# Altium PCB PMS.PcbDoc (part 2 of 3)
Units mm, origin at the board's own origin, x right, y up, seen from the top; angles counter-clockwise.
Board outline 23.9 x 83.5 mm, 4 copper layers (Top Layer, Mid Layer 1, Mid Layer 2, Bottom Layer), stack 0.77 mm thick; 91 components, 62 nets, 411 pads, 218 vias.
Unrouted connection lines stored in the file: 98.
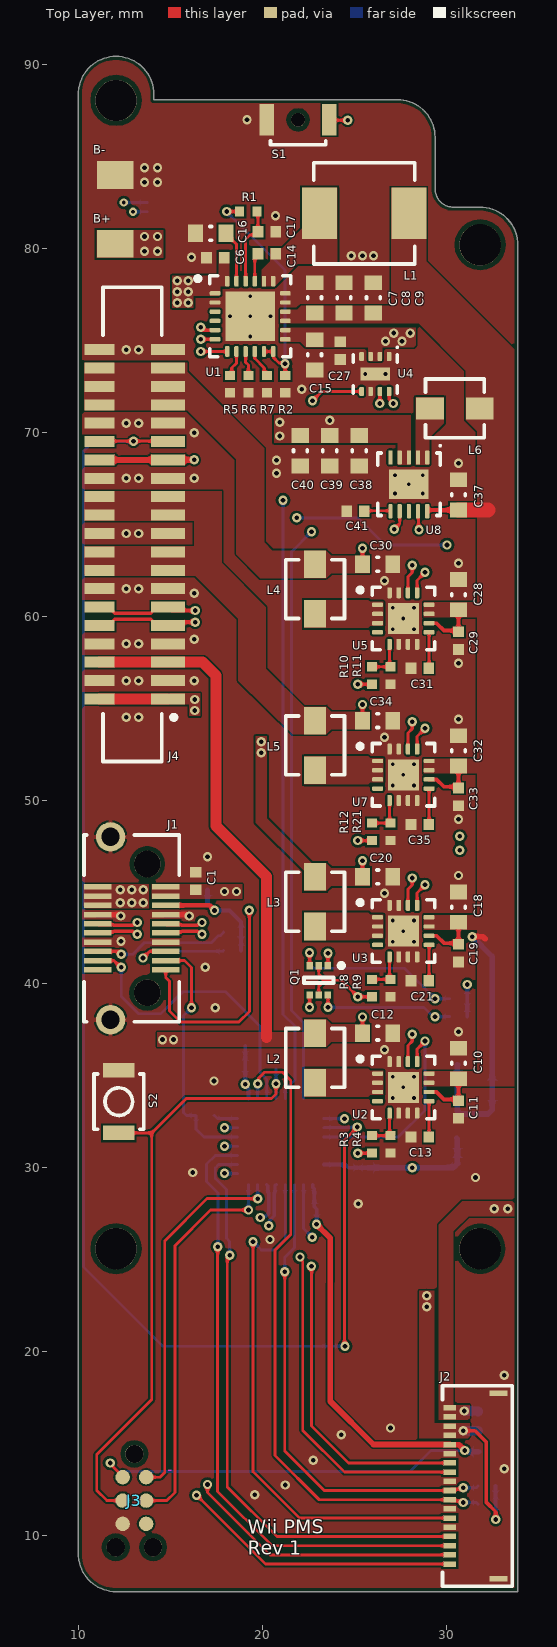
[diagram p0: Top Layer view]

## Via types
v1: diameter 0.508, hole 0.254, Top Layer to Bottom Layer, tented both sides, 184 vias
v2: diameter 0.381, hole 0.2, Top Layer to Bottom Layer, tented both sides, 32 vias
v3: diameter 0.45, hole 0.2, Top Layer to Bottom Layer, tented both sides, 2 vias

## Nets (pads, with @x,y where several pads share a name; then routed paths per layer and width w, separated by ;. In a path a pad name is that pad's centre, name@x,y a point inside that pad or via, vN(x,y) a via of type N, cw(c..) or ccw(c..) an arc to the next point about the centre after c; other vN are vias at no path point) (continued)
1V0: (continued)
  Top Layer w0.152: v1(25.2,47.8) R12.2@25.975,47.8 ; C34.2@25.45,54.325 v1(25.45,55.2) ; U7.14@27.925,52.775 27.925,53.65 28.159,53.884 v1(28.159,54.267)
  Mid Layer 2 w0.152: v1(25.2,47.8) 22.275,47.8 21.725,48.35 21.725,54.725 22.2,55.2 v1(25.45,55.2) 27.65,55.2 28.159,54.691 v1(28.159,54.267)
1V8: C20.2 J4.1 L3.2 Q1.2 Q1.5 R8.2 U3.14 | length 28.3
  Top Layer w0.152: Q1.5@23.075,39.4 23.075,39.875 23.4,40.2 ; Q1.2@23.075,41 23.075,40.525 23.4,40.2 ; C20.2@25.45,45.825 v1(25.45,46.7) ; R8.2@25.975,39.3 v1(25.2,39.3) 24.3,40.2 23.4,40.2 ; U3.14@27.925,44.275 27.925,45.15 28.159,45.384 v1(28.159,45.767)
  Top Layer w0.6: J4.1@11.15,55.5 J4.1@14.875,55.5
  Mid Layer 2 w0.152: v1(25.2,39.3) 22.275,39.3 21.725,39.85 21.725,46.225 22.2,46.7 v1(25.45,46.7) 27.65,46.7 28.159,46.191 v1(28.159,45.767)
  other v1: 19.95,52.575 19.95,53.175 16.325,54.875 16.325,55.475
1V15: C30.2 J4.17 J4.18 J4.19 L4.2 R10.2 U5.14 | length 20.6
  Top Layer w0.152: v1(25.2,56.3) R10.2@25.975,56.3 ; C30.2@25.45,62.825 v1(25.45,63.7) ; U5.14@27.925,61.275 27.925,62.15 28.159,62.384 v1(28.159,62.767)
  Mid Layer 2 w0.152: v1(25.2,56.3) 22.325,56.3 21.725,56.9 21.725,63.225 22.2,63.7 v1(25.45,63.7) 27.65,63.7 28.159,63.191 v1(28.159,62.767)
3V3: C4.2 C12.2 J2.15 J2.16 J4.3 L2.2 R3.2 R19.2 R20.2 U2.14 | length 56.6
  Top Layer w0.152: v1(25.2,30.8) R3.2@25.975,30.8 ; C12.2@25.45,37.325 v1(25.45,38.2) ; U2.14@27.925,35.775 27.925,36.65 28.159,36.884 v1(28.159,37.267)
  Top Layer w0.203: v1(30.94,15.7) 31.565,15.7 32.19,15.075 32.19,11.8 32.7,11.29 v1(32.7,10.875)
  Top Layer w0.6: J4.3@11.15,57.5 J4.3@14.875,57.5 16.75,57.5 17.475,56.775 17.475,48.6 20.225,45.85 20.225,37.1
  Mid Layer 2 w0.152: v1(25.2,30.8) 22.275,30.8 21.725,31.35 21.725,37.725 22.2,38.2 v1(25.45,38.2) 27.65,38.2 28.159,37.691 v1(28.159,37.267)
  Bottom Layer w0.203: R20.2@32.69,12.7 R19.2@32.69,11.7 32.7,11.69 v1(32.7,10.875)
  Bottom Layer w0.508: v1(30.94,15.7) C4.2@31.745,15.7
  other v1: 28.95,22.45 28.95,23.05 14.575,36.975 15.175,36.975